# Altium PCB PCB1.PcbDoc (part 2 of 2)
Units mm, origin at the board's own origin, x right, y up, seen from the top; angles counter-clockwise.
Board outline 105 x 110 mm, 4 copper layers (Top Layer, Layer 1, Layer 2, Bottom Layer), stack 0.603 mm thick; 82 components, 77 nets, 297 pads, 49 vias.
Unrouted connection lines stored in the file: 1.
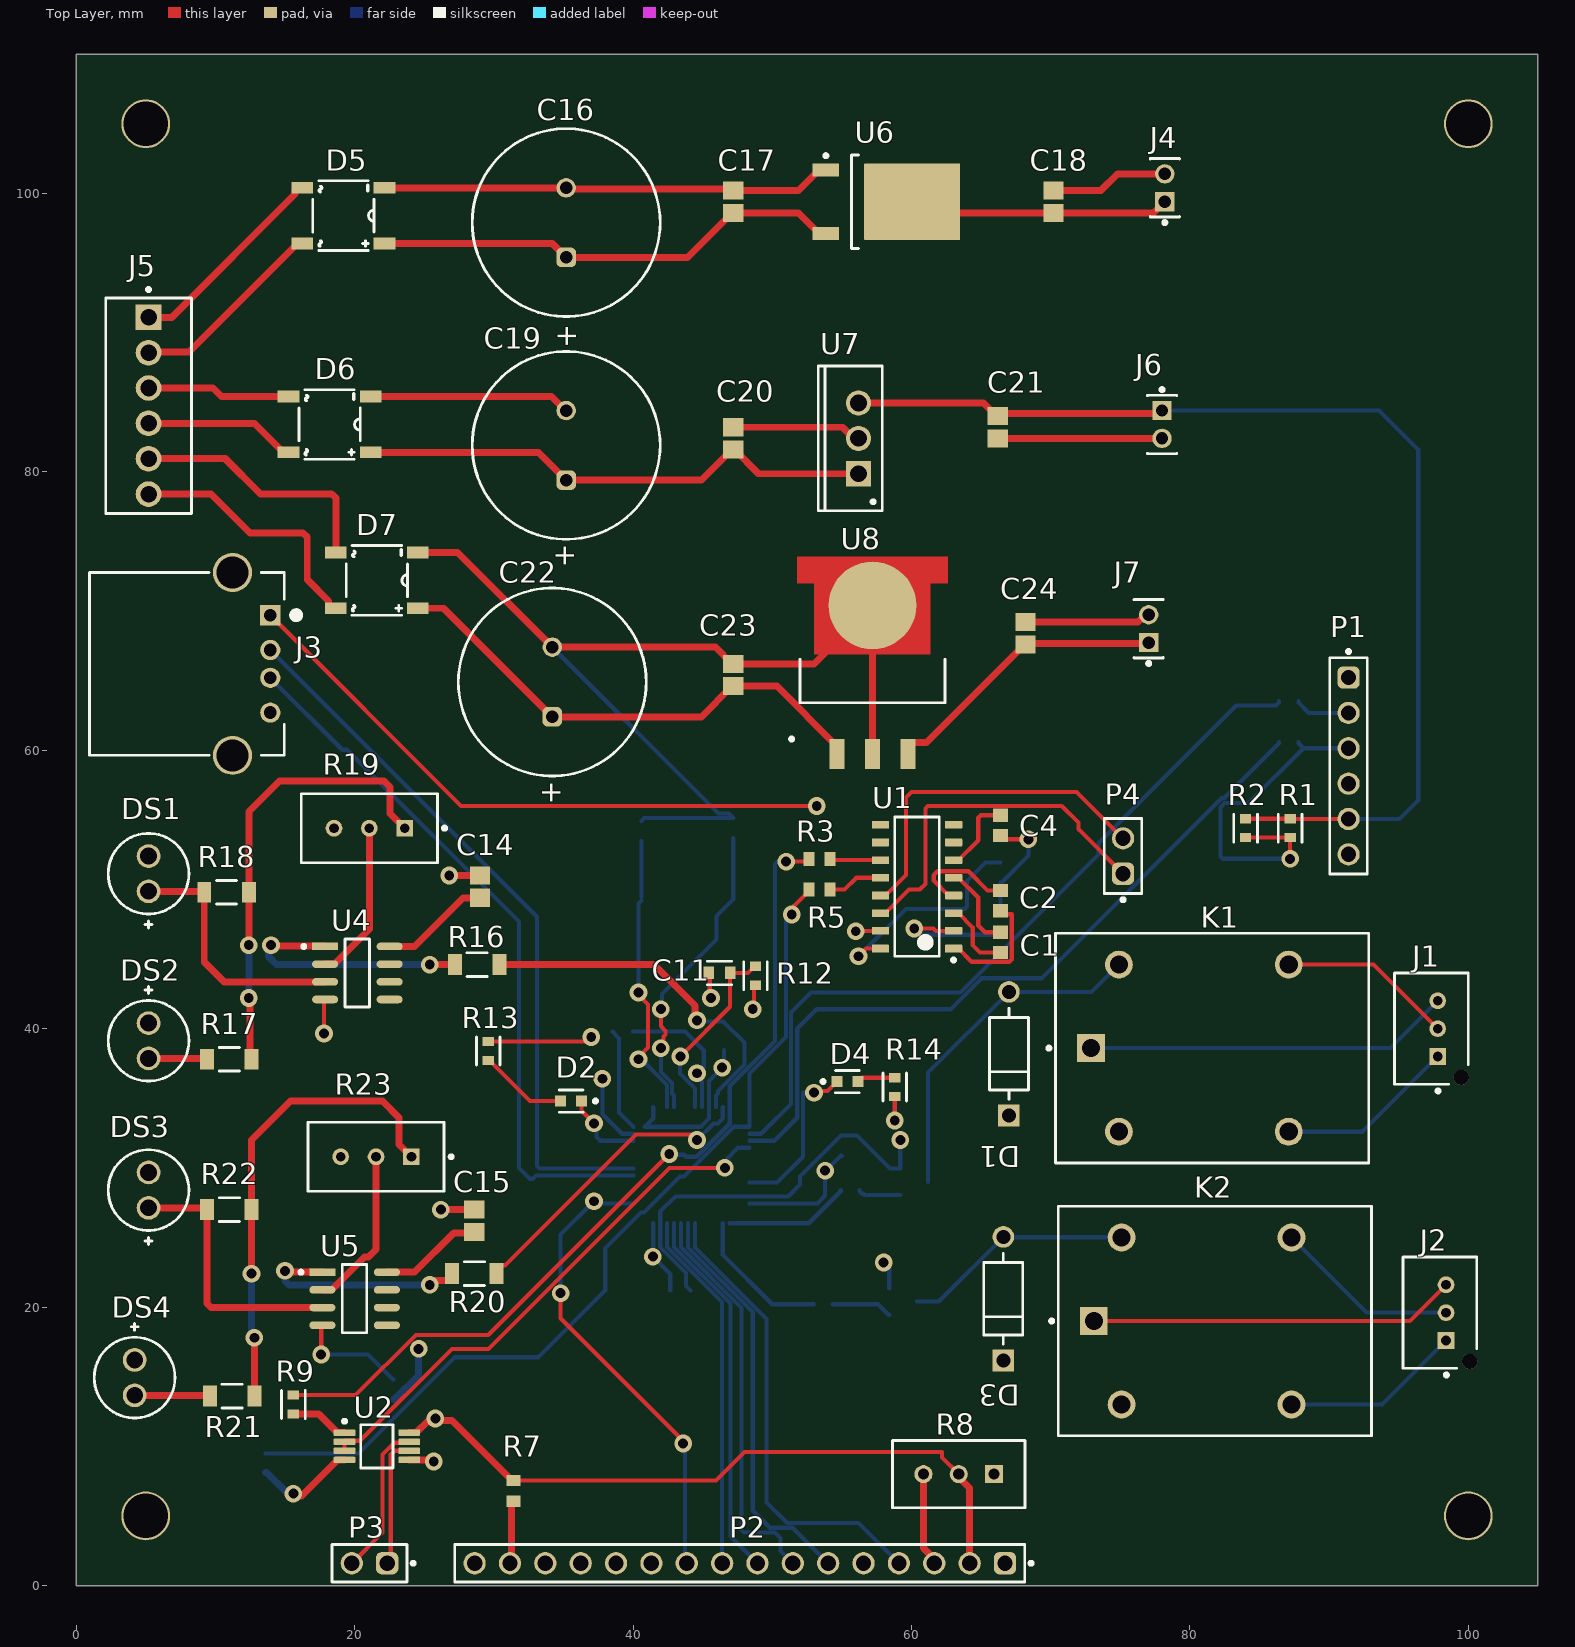
[diagram p0: Top Layer view]

## Via types
v1: diameter 1.27, hole 0.711, Top Layer to Bottom Layer, 49 vias

## Nets (pads, with @x,y where several pads share a name; then routed paths per layer and width w, separated by ;. In a path a pad name is that pad's centre, name@x,y a point inside that pad or via, vN(x,y) a via of type N, cw(c..) or ccw(c..) an arc to the next point about the centre after c; other vN are vias at no path point) (continued)
NetR4_2: (continued)
  Bottom Layer w0.3: U3.14 49.2,32.45 49.344,32.594 51.35,34.599 51.35,41.174 52.776,42.6 63.533,42.6 73.434,52.501 73.434,53.318 83.335,63.219 86.2,63.219 86.4,63.419 R4.2
NetR5_1: R5.1 R10.1 U3.13 | length 64.7
  Top Layer w0.3: v1(51.4,48.2) 51.586,48.386 51.586,48.836 52.65,49.9 R5.1
  Bottom Layer w0.3: R10.1 20.277,9.477 27.2,16.4 33.2,16.4 38,21.2 38,24.2 40.587,26.787 40.787,26.787 43.374,29.374 43.65,29.374 47.223,32.948 U3.13 U3.13 48.375,36.775 51,39.4 v1@51,48
NetR5_2: R5.2 U1.12 | length 4
  Top Layer w0.3: R5.2 55.2,50 56.035,50.835 U1.12
NetR6_2: R6.2 U3.15 | length 53.7
  Bottom Layer w0.3: U3.15 50.15,31.95 51.8,33.6 51.8,40 53.2,41.4 62.828,41.4 65.043,43.615 69.334,43.615 82.269,56.55 82.45,56.55 86.4,60.5 R6.2
NetR9_2: R9.2 U2.1 | length 4.2
  Top Layer w0.5: R9.2 17.427,12.323 18.775,10.975 U2.1
NetR10_2: R10.2 U2.4 | length 7.4
  Top Layer w0.5: v1(15.6,6.6) 15.768,6.432 16.182,6.432 18.775,9.025 U2.4
  Bottom Layer w0.5: R10.2 13.677,8.123 15.053,6.747 15.453,6.747 v1(15.6,6.6)
NetR11_1: R11.1 U3.25 | length 9
  Bottom Layer w0.3: U3.25 52.625,26.025 54.923,28.323 R11.1
NetR15_1: R15.1 U3.26 | length 10.3
  Bottom Layer w0.3: U3.26 46.45,23.75 50,20.2 R15.1
NetR16_1: R16.1 U4.1 | length 18.5
  Top Layer w0.5: v1(14,46) 14.073,45.927 17.862,45.927 U4.1 ; v1(25.4,44.6) R16.1
  Bottom Layer w0.5: v1(14,46) 13.8,45.8 13.8,45.2 14.4,44.6 v1(25.4,44.6)
NetR16_2: R16.2 U3.10 | length 25.9
  Top Layer w0.5: R16.2 41.522,44.6 44.453,41.67 44.453,40.747 v1(44.6,40.6)
  Bottom Layer w0.3: v1(44.6,40.6) 44.677,40.523 46.477,40.523 48,39 48,37.419 46.094,35.513 46.094,35.344 45.95,35.2 U3.10
NetR17_2: R17.2 R18.2 R19.1 | length 32.3
  Top Layer w0.5: v1(12.4,42.2) 12.5,42.1 12.5,37.9 R17.2 ; v1@12.4,46.2 R18.2 12.4,55.6 14.6,57.8 22.107,57.8 22.543,57.364 22.543,55.457 R19.1
  Bottom Layer w0.5: v1(12.4,42.2) v1(12.4,46)
NetR19_2: R19.2 U4.2 | length 11.5
  Top Layer w0.5: U4.2 18.549,44.635 21.06,47.146 R19.2
NetR20_1: R20.1 U5.1 | length 16
  Top Layer w0.5: v1(15,22.6) 15.095,22.505 U5.1 ; v1(25.4,21.6) 25.7,21.9 26.75,21.9 27,22.15 R20.1
  Bottom Layer w0.5: v1(15,22.6) 15,21.893 15.293,21.6 v1(25.4,21.6)
NetR20_2: R20.2 U3.11 | length 22
  Top Layer w0.3: R20.2 30.2,22.65 30.55,23 30.8,23 40.2,32.4 v1@44.6,32.4
  Bottom Layer w0.3: v1(44.6,32) 45.798,33.198 46.098,33.198 46.306,33.407 ; 46.306,33.407 46.45,33.551 U3.11
NetR21_2: R21.2 R22.2 R23.1 | length 33.9
  Top Layer w0.5: v1(12.6,22.4) R22.2 12.6,32 15.4,34.8 22,34.8 23.2,33.6 23.2,31.68 R23.1 ; R21.2 v1(12.8,17.8)
  Bottom Layer w0.5: v1(12.6,22.4) 12.6,18 v1(12.8,17.8)
NetR23_2: R23.2 U5.2 | length 11.7
  Top Layer w0.5: U5.2 18.349,21.235 20.714,23.6 21,23.6 21.54,24.14 R23.2
NetU2_2: U2.2 U2.3 U3.16 | length 38.8
  Top Layer w0.3: U2.3 U2.2 19.35,10.4 20.4,10.4 27,17 29.619,17 42.619,30 v1(46.6,30)
  Bottom Layer w0.3: v1(46.6,30) 46.786,30.186 46.786,30.685 47.407,31.306 47.551,31.45 U3.16
pads on no net: J1. J2. P1.1 P1.6 P2.11 P2.12 P2.13 P2.14 U1.7 U1.8 U1.9 U1.10 U3.2 U3.5 U3.6 U3.17 U3.18 U3.19 U3.20 U3.22 U3.27 U3.28 U3.29 U3.38 U3.39 U3.40 U3.43 U3.44 U3.45 U4.5 U4.6 U4.7 U5.5 U5.6 U5.7

## Polygon pours and split planes (outlines as drawn)
+3.3 on Layer 2 "+3.3_L03_P004" (solid, pour order 4): 31.6,56.4 31.4,56.2 31.4,23.6 37.6,17.4 55.2,17.4 61.8,24 61.8,51.4 55.2,58 43,58
+5 on Layer 2 "+5_L03_P003" (solid, pour order 3): 0.6,58 0.2,57.6 0.2,12.4 4.6,8 21.2,8 29,15.8 29,19.4 29,27.2 29,57.4 29,58.2
no net on Layer 2 "NONET_L03_P001" (solid, pour order 1): 103,13.4 103,13.2 102.8,13
GND on Layer 1 "GND_L02_P002" (solid, pour order 2): 0,0 0,110 104.952,110 105,109.952 105,-0.335 105.266,-0.6

## Silkscreen, mask and mechanical layers (free items; w line width, h text height)
Mechanical 1:
  the board outline again, w0.254

## Text inside footprints (layer, text, board x,y; h text height)
C16: Top Overlay "+" at 34.6,90.6 h1.5 r270
C19: Top Overlay "+" at 34.463,74.825 h1.5 r270
C22: Top Overlay "+" at 33.463,57.825 h1.5 r270